# Altium PCB 606-100835.pcbdoc (part 3 of 3)
Units mm, origin at the board's own origin, x right, y up, seen from the top; angles counter-clockwise.
Board outline 27 x 28.35 mm, 6 copper layers (Layer 1, Layer 2, Layer 3, Layer 4, Layer 5, Layer 6), stack 1.518 mm thick; 145 components, 197 nets, 755 pads, 438 vias.
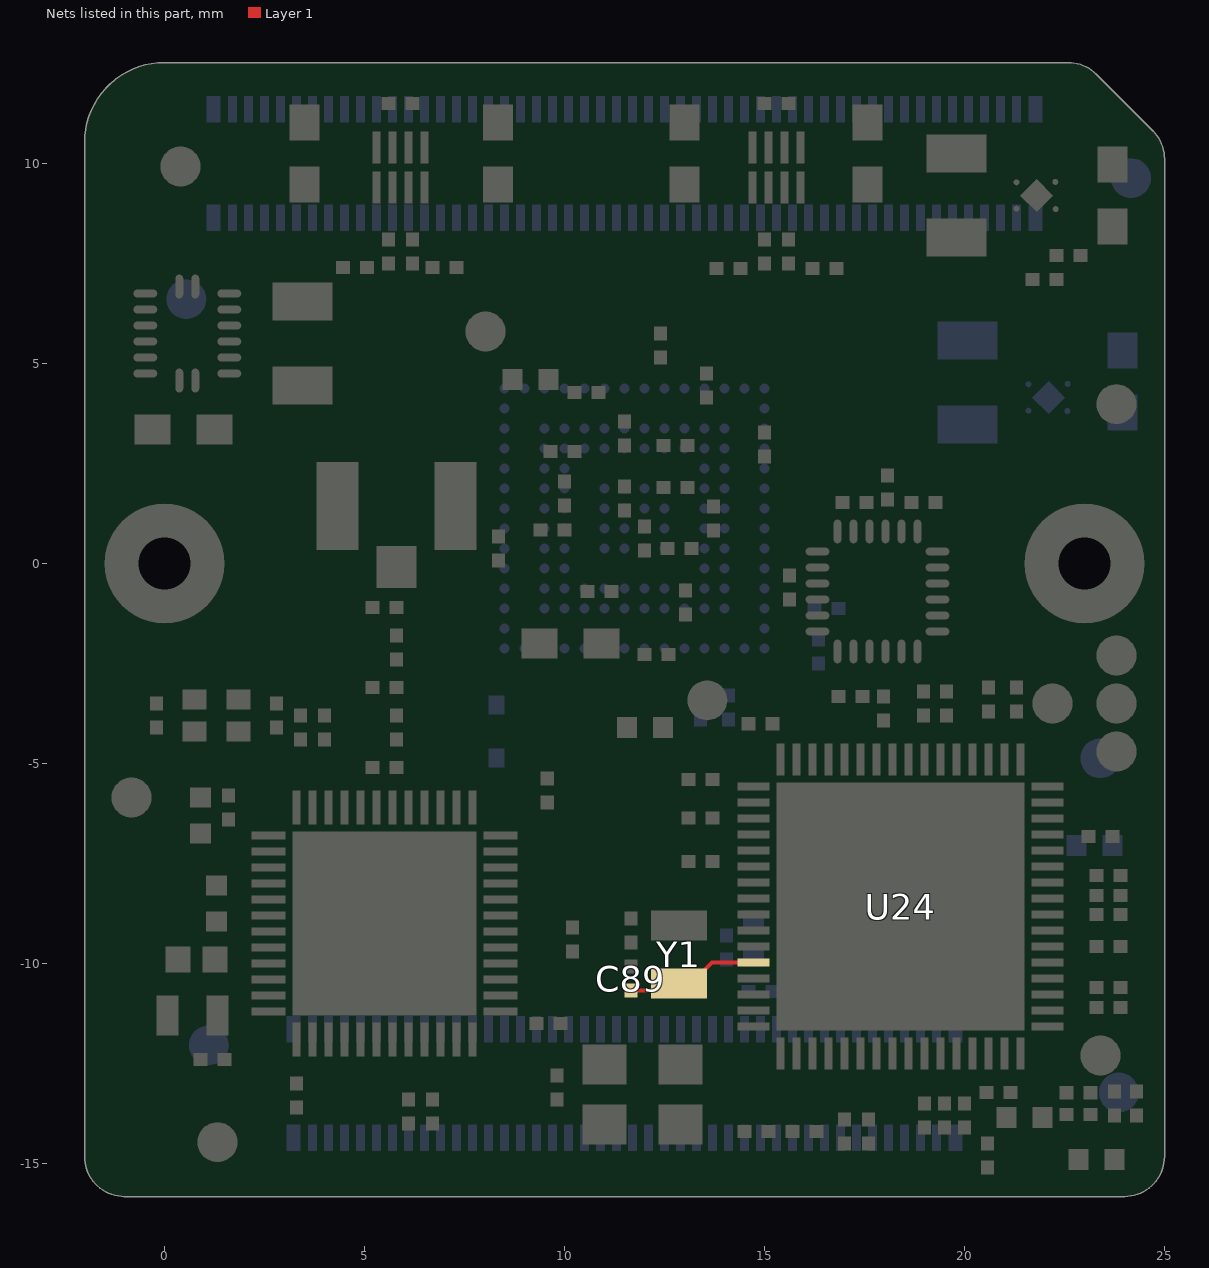
[diagram p7: the nets of this part, all layers, seen from the top]

## Via types
v1: diameter 0.4, hole 0.2, Layer 1 to Layer 6, tented both sides, 358 vias
v2: diameter 0.381, hole 0.279, Layer 4 to Layer 6, tented bottom, 80 vias

## Nets (pads, with @x,y where several pads share a name; then routed paths per layer and width w, separated by ;. In a path a pad name is that pad's centre, name@x,y a point inside that pad or via, vN(x,y) a via of type N, cw(c..) or ccw(c..) an arc to the next point about the centre after c; other vN are vias at no path point) (continued)
XOUT: C89.1 U24.12 Y1.2 | length 3.4
  Layer 1 w0.1: C89.1@11.659,-10.675 12.684,-10.675 Y1.2@12.859,-10.5 13.159,-10.5 13.684,-9.975 U24.12@14.725,-9.975
pads on no net: U1.A13 U1.H3 U1.J11 U1.K11 U1.M12 U1.M14 U4.1 U4.4 U4.15 U4.16 U23.1 U23.2 U23.3 U23.4 U23.5 U23.6 U23.7 U23.14 U23.15 U23.16 U23.17 U23.19 U23.21 U25.10 U25.18 U25.19 U25.27 U25.28 U25.29 U25.37 U25.38 U25.39 U25.40 U25.41 U25.42 U25.43 U25.44

## Polygon pours and split planes (outlines as drawn)
no net on FAB_DWG (solid): 17.95,277.4 17.95,279 11.925,279 11.925,277.4
no net on FAB_DWG (solid): 18.048,286.528 17.548,288.028 -13.452,288.028 -13.952,286.528 18.048,286.528
no net on FAB_DWG (solid): -13.673,268.247 -13.173,266.747 17.827,266.747 18.327,268.247 -13.673,268.247
no net on FAB_DWG (solid): -13.811,303.588 -13.311,302.088 17.889,302.088 18.389,303.588 -13.811,303.588
no net on FAB_DWG (solid): -14.694,324.252 -14.194,325.752 18.324,325.752 18.824,324.252
no net on FAB_DWG (solid): -10.978,261.558 ccw(c-11.478,261.558) -11.478,262.058 ccw(c-11.478,261.558) -11.978,261.558 ccw(c-11.478,261.558) -11.478,261.058 ccw(c-11.478,261.558) -10.978,261.558
no net on FAB_DWG (solid): -11.171,331.178 ccw(c-11.671,331.178) -11.671,331.678 ccw(c-11.671,331.178) -12.171,331.178 ccw(c-11.671,331.178) -11.671,330.678 ccw(c-11.671,331.178) -11.171,331.178
no net on FAB_DWG (solid): -4.978,261.558 ccw(c-5.478,261.558) -5.478,262.058 ccw(c-5.478,261.558) -5.978,261.558 ccw(c-5.478,261.558) -5.478,261.058 ccw(c-5.478,261.558) -4.978,261.558
no net on FAB_DWG (solid): -2.978,261.558 ccw(c-3.478,261.558) -3.478,262.058 ccw(c-3.478,261.558) -3.978,261.558 ccw(c-3.478,261.558) -3.478,261.058 ccw(c-3.478,261.558) -2.978,261.558
no net on FAB_DWG (solid): -8.978,261.558 ccw(c-9.478,261.558) -9.478,262.058 ccw(c-9.478,261.558) -9.978,261.558 ccw(c-9.478,261.558) -9.478,261.058 ccw(c-9.478,261.558) -8.978,261.558
no net on FAB_DWG (solid): -6.978,261.558 ccw(c-7.478,261.558) -7.478,262.058 ccw(c-7.478,261.558) -7.978,261.558 ccw(c-7.478,261.558) -7.478,261.058 ccw(c-7.478,261.558) -6.978,261.558
no net on FAB_DWG (solid): -3.171,331.178 ccw(c-3.671,331.178) -3.671,331.678 ccw(c-3.671,331.178) -4.171,331.178 ccw(c-3.671,331.178) -3.671,330.678 ccw(c-3.671,331.178) -3.171,331.178
no net on FAB_DWG (solid): -5.171,331.178 ccw(c-5.671,331.178) -5.671,331.678 ccw(c-5.671,331.178) -6.171,331.178 ccw(c-5.671,331.178) -5.671,330.678 ccw(c-5.671,331.178) -5.171,331.178
no net on FAB_DWG (solid): -9.171,331.178 ccw(c-9.671,331.178) -9.671,331.678 ccw(c-9.671,331.178) -10.171,331.178 ccw(c-9.671,331.178) -9.671,330.678 ccw(c-9.671,331.178) -9.171,331.178
no net on FAB_DWG (solid): -7.171,331.178 ccw(c-7.671,331.178) -7.671,331.678 ccw(c-7.671,331.178) -8.171,331.178 ccw(c-7.671,331.178) -7.671,330.678 ccw(c-7.671,331.178) -7.171,331.178
no net on FAB_DWG (solid): 5.022,261.558 ccw(c4.522,261.558) 4.522,262.058 ccw(c4.522,261.558) 4.022,261.558 ccw(c4.522,261.558) 4.522,261.058 ccw(c4.522,261.558) 5.022,261.558
no net on FAB_DWG (solid): 3.022,261.558 ccw(c2.522,261.558) 2.522,262.058 ccw(c2.522,261.558) 2.022,261.558 ccw(c2.522,261.558) 2.522,261.058 ccw(c2.522,261.558) 3.022,261.558
no net on FAB_DWG (solid): -0.978,261.558 ccw(c-1.478,261.558) -1.478,262.058 ccw(c-1.478,261.558) -1.978,261.558 ccw(c-1.478,261.558) -1.478,261.058 ccw(c-1.478,261.558) -0.978,261.558
no net on FAB_DWG (solid): 1.022,261.558 ccw(c0.522,261.558) 0.522,262.058 ccw(c0.522,261.558) 0.022,261.558 ccw(c0.522,261.558) 0.522,261.058 ccw(c0.522,261.558) 1.022,261.558
no net on FAB_DWG (solid): 4.829,331.178 ccw(c4.329,331.178) 4.329,331.678 ccw(c4.329,331.178) 3.829,331.178 ccw(c4.329,331.178) 4.329,330.678 ccw(c4.329,331.178) 4.829,331.178
no net on FAB_DWG (solid): 2.829,331.178 ccw(c2.329,331.178) 2.329,331.678 ccw(c2.329,331.178) 1.829,331.178 ccw(c2.329,331.178) 2.329,330.678 ccw(c2.329,331.178) 2.829,331.178
no net on FAB_DWG (solid): -1.171,331.178 ccw(c-1.671,331.178) -1.671,331.678 ccw(c-1.671,331.178) -2.171,331.178 ccw(c-1.671,331.178) -1.671,330.678 ccw(c-1.671,331.178) -1.171,331.178
no net on FAB_DWG (solid): 0.829,331.178 ccw(c0.329,331.178) 0.329,331.678 ccw(c0.329,331.178) -0.171,331.178 ccw(c0.329,331.178) 0.329,330.678 ccw(c0.329,331.178) 0.829,331.178
no net on FAB_DWG (solid): 11.022,261.558 ccw(c10.522,261.558) 10.522,262.058 ccw(c10.522,261.558) 10.022,261.558 ccw(c10.522,261.558) 10.522,261.058 ccw(c10.522,261.558) 11.022,261.558
no net on FAB_DWG (solid): 9.022,261.558 ccw(c8.522,261.558) 8.522,262.058 ccw(c8.522,261.558) 8.022,261.558 ccw(c8.522,261.558) 8.522,261.058 ccw(c8.522,261.558) 9.022,261.558
no net on FAB_DWG (solid): 13.022,261.558 ccw(c12.522,261.558) 12.522,262.058 ccw(c12.522,261.558) 12.022,261.558 ccw(c12.522,261.558) 12.522,261.058 ccw(c12.522,261.558) 13.022,261.558
no net on FAB_DWG (solid): 7.022,261.558 ccw(c6.522,261.558) 6.522,262.058 ccw(c6.522,261.558) 6.022,261.558 ccw(c6.522,261.558) 6.522,261.058 ccw(c6.522,261.558) 7.022,261.558
no net on FAB_DWG (solid): 10.829,331.178 ccw(c10.329,331.178) 10.329,331.678 ccw(c10.329,331.178) 9.829,331.178 ccw(c10.329,331.178) 10.329,330.678 ccw(c10.329,331.178) 10.829,331.178
no net on FAB_DWG (solid): 8.829,331.178 ccw(c8.329,331.178) 8.329,331.678 ccw(c8.329,331.178) 7.829,331.178 ccw(c8.329,331.178) 8.329,330.678 ccw(c8.329,331.178) 8.829,331.178
no net on FAB_DWG (solid): 12.829,331.178 ccw(c12.329,331.178) 12.329,331.678 ccw(c12.329,331.178) 11.829,331.178 ccw(c12.329,331.178) 12.329,330.678 ccw(c12.329,331.178) 12.829,331.178
no net on FAB_DWG (solid): 6.829,331.178 ccw(c6.329,331.178) 6.329,331.678 ccw(c6.329,331.178) 5.829,331.178 ccw(c6.329,331.178) 6.329,330.678 ccw(c6.329,331.178) 6.829,331.178
no net on FAB_DWG (solid): 17.022,261.558 ccw(c16.522,261.558) 16.522,262.058 ccw(c16.522,261.558) 16.022,261.558 ccw(c16.522,261.558) 16.522,261.058 ccw(c16.522,261.558) 17.022,261.558
no net on FAB_DWG (solid): 15.022,261.558 ccw(c14.522,261.558) 14.522,262.058 ccw(c14.522,261.558) 14.022,261.558 ccw(c14.522,261.558) 14.522,261.058 ccw(c14.522,261.558) 15.022,261.558
no net on FAB_DWG (solid): 16.829,331.178 ccw(c16.329,331.178) 16.329,331.678 ccw(c16.329,331.178) 15.829,331.178 ccw(c16.329,331.178) 16.329,330.678 ccw(c16.329,331.178) 16.829,331.178
no net on FAB_DWG (solid): 14.829,331.178 ccw(c14.329,331.178) 14.329,331.678 ccw(c14.329,331.178) 13.829,331.178 ccw(c14.329,331.178) 14.329,330.678 ccw(c14.329,331.178) 14.829,331.178
no net on FAB_DWG (solid): 18.361,310.587 17.861,312.087 -13.339,312.087 -13.839,310.587 18.361,310.587
no net on FAB_DWG (solid): 1029 vertices, not listed, extent 369.396,-60.519 510.442,-46.945
no net on FAB_DWG (solid): 89 vertices, not listed, extent 409.616,-50.711 416.035,-46.947
no net on FAB_DWG (solid): 74 vertices, not listed, extent 421.286,-53.682 428.678,-46.947
no net on FAB_DWG (solid): 83 vertices, not listed, extent 435.068,-52.447 439.973,-47.859
no net on FAB_DWG (solid): 82 vertices, not listed, extent 446.68,-51.092 453.025,-47.864
no net on FAB_DWG (solid, pour order 2): 7.95,277.4 7.95,279 -14,279 -14,277.4
no net on ASY_DWG (solid): 1029 vertices, not listed, extent 369.396,-60.519 510.442,-46.945
no net on ASY_DWG (solid): 89 vertices, not listed, extent 409.616,-50.711 416.035,-46.947
no net on ASY_DWG (solid): 74 vertices, not listed, extent 421.286,-53.682 428.678,-46.947
no net on ASY_DWG (solid): 83 vertices, not listed, extent 435.068,-52.447 439.973,-47.859
no net on ASY_DWG (solid): 82 vertices, not listed, extent 446.68,-51.092 453.025,-47.864
no net on ASY_DWG_R (solid): 1029 vertices, not listed, extent -260.544,-60.477 -119.498,-46.903
no net on ASY_DWG_R (solid): 89 vertices, not listed, extent -166.137,-50.669 -159.717,-46.905
no net on ASY_DWG_R (solid): 74 vertices, not listed, extent -178.78,-53.64 -171.387,-46.905
no net on ASY_DWG_R (solid): 83 vertices, not listed, extent -190.074,-52.405 -185.169,-47.817
no net on ASY_DWG_R (solid): 82 vertices, not listed, extent -203.127,-51.05 -196.782,-47.822
no net on TITLEBLOCK (solid): 331 vertices, not listed, extent -11.699,-33.273 47.006,-26.653
no net on TITLEBLOCK (solid): 10.238,-26.873 12.776,-29.191 12.776,-26.873 10.238,-26.873
no net on TITLEBLOCK (solid): 5.051,-26.873 6.174,-28.082 7.253,-26.873 5.051,-26.873
no net on TITLEBLOCK (solid): 15.536,-28.773 16.526,-26.973 17.426,-28.773 15.536,-28.773
no net on TITLEBLOCK (solid): 26 vertices, not listed, extent 20.376,-28.173 23.076,-26.873
GND on Layer 5 "GND" (solid, remove dead copper, pour order 2): -2.876,13.977 -2.876,-16.773 26.174,-16.773 26.174,11.527 23.724,13.977
GND on Layer 1 "GND_L01_P086" (solid, remove dead copper, pour order 86): 24.7,7.3 24.7,8.725 24.525,8.9 23.175,8.9 23,8.725 23,7.35 23.25,7.1 24.5,7.1
GND on Layer 1 "GND_L01_P080" (solid, remove dead copper, pour order 80): 18.6,10 18.4,10.2 17.3,10.2 17.1,10 17.1,9.1 17.1,8.4 16.675,7.975 16.675,7.1 18.265,7.1 18.6,7.435
VCC_3V3_SENSORS on Layer 1 "VCC_3V3_SENSORS_L01_P076" (solid, remove dead copper, pour order 76): 15.705,9.7 15.805,9.8 17,9.8 17,8.7 16.95,8.65 15.855,8.65 15.705,8.8
SENSOR_VCC4 on Layer 1 "SENSOR_VCC4_L01_P074" (solid, remove dead copper, pour order 74): 15.714,10.8 15.714,12.2 15.799,12.285 20.215,12.285 20.3,12.2 20.3,11.4 19.5,10.6 18,10.6 16.825,10.6 16.6,10.6 16.4,10.4 16.4,10.1 15.714,10.1
VCC_3V3_SENSORS on Layer 1 "VCC_3V3_SENSORS_L01_P072" (solid, remove dead copper, pour order 72): 13.557,9.657 13.7,9.8 15,9.8 15,8.8 14.85,8.65 13.75,8.65 13.557,8.843
GND on Layer 1 "GND_L01_P070" (solid, remove dead copper, pour order 70): 13.15,8.575 11.725,8.575 11.384,8.916 11.384,10.025 11.484,10.125 13.392,10.125 13.392,8.817
VCC_3V3_SENSORS on Layer 1 "VCC_3V3_SENSORS_L01_P066" (solid, remove dead copper, pour order 66): 6.305,9.7 6.405,9.8 7.6,9.8 7.7,9.7 7.7,8.8 7.6,8.7 6.405,8.7 6.305,8.8
GND on Layer 1 "GND_L01_P064" (solid, remove dead copper, pour order 64): 9.693,8.575 7.992,8.575 7.792,8.775 7.792,10 7.892,10.1 9.8,10.1 9.9,10 9.9,8.782
GND on Layer 1 "GND_L01_P060" (solid, remove dead copper, pour order 60): 2.606,10.321 3.206,10.321 3.731,10.321 4.131,9.921 4.131,9.146 3.631,8.646 2.681,8.646 2.506,8.821 2.506,10.221
GND on Layer 1 "GND_L01_P008" (solid, pour order 8): 7.75,-4.225 7.325,-4.6 7.325,-5.575 5.4,-5.575 5.4,-4.775 4.4,-4.775 4.4,-3.975 3.175,-3.975 3.175,2.55 7.7,2.55
VCC_3V6 on Layer 1 "u4_3v6_notherm" (solid, remove dead copper, pour order 14): -1.75,7.6 -1.75,3.05 -1.425,2.725 0.075,2.725 0.175,2.825 0.175,4.05 -0.025,4.25 -1,4.25 -1,7.6
GND on Layer 1 "u4_gnd_notherm" (solid, remove dead copper, pour order 16): 0.9,2.75 2.975,2.75 4.2,3.975 4.2,5.25 2.087,5.25 1.4,5.25 1.4,5.05 2.087,5.05 2.087,4.362 1.975,4.25 0.975,4.25 0.775,4.05 0.775,2.875
VCC_1V2 on Layer 1 "u4_1v2_notherm" (solid, remove dead copper, pour order 18): 19 vertices, not listed, extent 0.3,5.8 4.2,8.15
VCC_3V6 on Layer 1 "u13_3v6" (solid, remove dead copper, pour order 20): 22.1,9.8 22.725,9.8 22.725,9.2 24.425,9.2 24.525,9.3 24.525,10.6 24.025,11.1 22.425,11.1 22.1,10.775
VCC_3V3_SENSORS on Layer 1 "u13_3v6" (solid, remove dead copper, pour order 22): 21,9.4 21,9.8 21.775,9.8 21.775,10.951 21.579,11.146 18.975,11.146 18.7,10.871 18.7,9.5 18.8,9.4
GND on Layer 1 "u13_gnd" (solid, remove dead copper, pour order 24): 21.8,8.6 21.1,8.6 21,8.6 21,9.1 18.9,9.1 18.8,9 18.8,7 18.85,6.95 21.75,6.95 21.845,7.045 21.845,7.535 21.875,7.535 21.875,8.525
VCC_3V3_SENSORS on Layer 1 "VCC_3V3_SENSORS_L01_P042" (solid, remove dead copper, pour order 42): 4.157,9.657 4.3,9.8 5.6,9.8 5.6,8.8 5.5,8.7 4.3,8.7 4.157,8.843
SENSOR_VCC3 on Layer 1 "SENSOR_VCC3_L01_P052" (solid, remove dead copper, pour order 52): 14.6,12.3 14.795,12.105 14.795,10 14,10 13.7,10.2 13.7,10.7 11.3,10.7 11.2,10.8 11.2,12.2 11.3,12.3
SENSOR_VCC2 on Layer 1 "SENSOR_VCC2_L01_P056" (solid, remove dead copper, pour order 56): 6.3,12.086 6.499,12.285 10.19,12.285 10.385,12.09 10.385,10.785 10.2,10.6 8.7,10.6 7.525,10.6 7.3,10.6 7.1,10.4 7.1,10 6.3,10
SENSOR_VCC1 on Layer 1 "SENSOR_VCC1_L01_P058" (solid, remove dead copper, pour order 58): 1.65,10.775 1.65,12.1 1.835,12.285 2.185,12.285 5.415,12.285 5.5,12.2 5.5,10.1 4.9,10.1 4.4,10.6 1.825,10.6
GND on Layer 1 "GND_L01_P128" (solid, pour order 128): 24 vertices, not listed, extent 8.675,-3.15 15.4,5.975
GND on Layer 6 "GND1" (solid, remove dead copper, pour order 10): 19,4.3 19,6.7 19.1,6.8 24.3,6.8 24.4,6.7 24.425,4.8 21.3,4.8 21.3,4.3
VCC_3V3_CORE on Layer 6 "VCC3-6" (solid, remove dead copper, pour order 32): 19,4 21.3,4 21.3,3.6 22,3.6 22,2.5 21.9,2.4 19,2.4
VCC_3V6 on Layer 6 "VCC3-6" (solid, remove dead copper, pour order 12): 24.475,4.6 24.475,2.8 24.3,2.625 22.3,2.624 22.3,3.5 22.9,3.5 22.9,4.7 24.375,4.7
VCC_3V3_SENSORS on Layer 3 "Bottom Overlay-No Net" (solid, pour order 126): 21.925,8.75 21.925,13.025 -2.5,13.025 -2.5,8.75 21.375,8.75
VCC_3V6 on Layer 3 "3V6_Polygon" (solid, pour order 94): 20.95,6.2 22.05,6.2 22.05,13.025 23.2,13.025 25.5,10.725 25.5,-16.325 16.675,-16.325 16.675,-12.65 20.95,-12.65
GND on Layer 3 "thievingL2" (solid, pour order 122): -0.75,2.25 -2.525,2.25 -2.525,-16.3 22.1,-16.3 22.1,2.275 22.1,8.85 -0.75,8.85
VCC_PLL on Layer 3 "VCC_PLL_L03_P088" (solid, remove dead copper, pour order 88): 8.5,1.6 9.3,1.6 10,0.9 10,0 10.6,-0.6 13.2,-0.6 13.4,-0.4 13.4,0.8 13.8,1.2 14.4,1.2 15.125,1.2 15.125,-1.475 8.5,-1.475
VCC_1V2 on Layer 3 "VCC_1V2_L03_P090" (solid, remove dead copper, pour order 90): 24 vertices, not listed, extent -0.85,-0.5 15.9,8.8
VCC_3V6 on Layer 3 "3V6_BUCK_INPUT" (solid, pour order 130): -2.5,8.75 -0.65,8.75 -0.65,2.25 -2.5,2.25
GND on Layer 3 "GND_CORNER" (solid, pour order 92): 25.525,-13.925 22.75,-13.925 22.525,-13.925 22.525,-16.325 25.525,-16.325 25.5,-16.3 25.5,-13.925
GND on Layer 4 "thievingL5" (solid, pour order 124): -2.5,13.025 -2.5,-16.325 25.525,-16.325 25.525,10.7 23.2,13.025
VCC_3V6 on Layer 2 (split plane): 47 vertices, not listed, extent -1.498,2.404 24.499,12.023
GND on Layer 2 (split plane): 18 vertices, not listed, extent -1.498,-5.171 4.371,7.746
VCC_3V3_SENSORS on Layer 2 (split plane): 24 vertices, not listed, extent -1.499,9.129 21.821,12.024
VCC_3V3_CORE on Layer 2 (split plane): 61 vertices, not listed, extent -1.499,-15.324 24.499,7.746

## Keep-outs
Layer 6:
  circle w0.254: c23,0 r2.305
  circle w0.254: c0,0 r2.305

## Other copper
Layer 1:
  text ".Layer_Name" at 19.375,-51.6 h2.54
Layer 3:
  text ".Layer_Name" at 18,-51.35 h2.54
Layer 5:
  text ".Layer_Name" at 18,-51.4 h2.54
Layer 4:
  text ".Layer_Name" at 18.2,-51.7 h2.54
Layer 6:
  text "'.Board_Number'-R'.PCB_Revision'" at -0.9,-14.725 h0.7 r270
  text ".Layer_Name" at 17.75,-51.6 h2.54
Layer 2 (plane layer: these items are gaps in the copper):
  pour cut-out: 3,2.75 7.775,2.75 7.775,-4.375 7.45,-4.65 7.45,-5.375 7.225,-5.625 6.325,-5.625 6.075,-5.9 6.075,-6.725 4.95,-6.725 4.95,-5.65 4.275,-4.975 4.275,-4.125 3,-4.125
  lines w0.254: -2.025,2.275 -1.15,2.275 ; -2,-3.3 -2,-5.3 3.7,-5.3 4.5,-4.5 4.5,7.85 ; -1.8,8.7 -1.5,9 21.95,9 21.95,12.25 22.25,12.55 22.35,12.55 ; -1.225,2.275 -1.125,2.275 -0.8,2.6 -0.8,7.3 -0.225,7.875 16.725,7.875 18.1,6.5 21.4,6.5 22.1,6.5 22.1,2.3 24.8,2.3 ; 9.45,-16.1 10.4,-16.1
  text ".Layer_Name" at 18.1,-51.55 h2.54

## Silkscreen, mask and mechanical layers (free items; w line width, h text height)
Top Overlay:
  lines w0.15: -1.075,-12.175 -1.075,-9.9 -0.4,-9.9 ; -1.075,-11.3 -0.6,-11.3 ; 11.6,-11.4 12.9,-11.4 12.9,-11.1 ; 17.5,2.4 17.5,3.2 17.5,6.5 18.4,6.5 22.79,6.5 22.79,1.8 19.7,1.8 ; 20.8,1.8 20.8,-2.4 21.6,-2.4 ; 21.6,-2.7 21.6,-1.8 23.2,-1.8 ; 23.05,-5.7 24.225,-5.7 24.35,-5.7 24.425,-5.7 24.425,-5.2
  lines w0.254: 5.268,-4.382 cw(c5.25,-4.4) 5.275,-4.4 ; 5.268,-2.382 cw(c5.25,-2.4) 5.275,-2.4
  lines w1.2: 11.375,9.9 11.375,11.1
  text "REV" at 11.9,6.35 h1.02 r90
  text "100835" at 10.425,6.325 h1.02 r90
  text ".Layer_Name" at 14,-51.6 h2.54
Bottom Overlay:
  text ".Layer_Name" at 9.925,-51.6 h2.54
Top Paste:
  text ".Layer_Name" at 15.05,-51.6 h2.54
Bottom Paste:
  text ".Layer_Name" at 13.025,-51.6 h2.54
Top Solder:
  text ".Layer_Name" at 15.175,-51.6 h2.54
Bottom Solder:
  text ".Layer_Name" at 11.85,-51.6 h2.54
OUTLINE:
  lines w0.15: -2,10.5 -2,-14.825 ccw(c-1,-14.825) -1,-15.825 ; -2,10.525 cw(c0,10.525) 0,12.525 ; -1.025,-15.825 24,-15.825 ccw(c24,-14.825) 25,-14.825 25,10.1 ; 0.025,12.525 22.611,12.525 ; 22.586,12.525 cw(c22.586,11.525) 23.293,12.232 24.707,10.818 cw(c24,10.111) 25,10.111
FAB_DWG:
  drawing of 395 lines, arcs and shapes, not listed
  text "1" at 453.278,397.469 h7.62
  text "6" at -98.054,397.291 h7.62
  text "5" at 12.538,397.215 h7.62
  text "7" at -207.985,397.164 h7.62
  text "4" at 122.139,397.063 h7.62
  text "3" at 232.908,397.063 h7.62
  text "2" at 342.941,397.063 h7.62
  text "REVISIONS" at 407.298,388.481 h2.54
  text "REV" at 325.006,381.481 h2.03
  text "DESCRIPTION" at 379.51,381.481 h2.03
  text "DATE" at 471.194,381.481 h2.03
  text "APRVD" at 496.382,381.481 h2.03
  text "NOTES: UNLESS OTHERWISE SPECIFIED" at -247.908,376.845 h2.03
  text "INITIAL RELEASE" at 336.442,373.481 h2.54
  text "06/03/16" at 465.282,373.481 h2.54
  text "01" at 325,373 h2.54
  text "1   DIMENSIONS AND VALUES ARE METRIC." at -247.908,368.845 h2.03
  text "INITIAL BUILD" at 336.442,366.506 h2.54
  text "06/06/16" at 465.282,366.506 h2.54
  text "02" at 325,366 h2.54
  text "2   FABRICATION OF PRINTED CIRCUIT BOARD SHALL BE IN ACCORDANCE WITH" at -247.908,362.845 h2.03
  text "03" at 325,360 h2.54
  text "ANTENNA TUNING, POWER TEST POINTS." at 336,360 h2.54
  text "07/13/16" at 465,360 h2.54
  text "IPC-6011 AND IPC-6012, CLASS 2, AND THE DESIGN INTENT OF IPC-2221 AND" at -247.908,358.845 h2.03
  text "IPC-2222,CLASS 2, AND SHALL MEET THE ACCEPTABILITY REQUIREMENTS OF" at -247.908,354.845 h2.03
  text "IPC-A-600. PRODUCE PCB USING GERBER OR ODB++ FILES PROVIDED." at -247.908,350.845 h2.03
  text "3   FABRICATION VENDOR MUST BE UL APPROVED AND BOARD SHALL BE MARKED WITH" at -247.908,344.845 h2.03
  text "PRIMARY SIDE" at -7.675,341.35 h2.29
  text "A UL REGISTERED LOGO. MATERIAL MUST MEET UL 94V-0 FLAMMABILITY RATING." at -247.908,340.845 h2.03
  text "SILKSCREEN" at 24.564,336.241 h2.29
  text "4   MATERIAL REQUIREMENTS: MANUFACTURER SHALL SELECT MATERIALS TO ACHIEVE A" at -247.908,334.845 h2.03
  text "BALANCED CONSTRUCTION WITH THE OPTION OF MODIFYING DIELECTRIC THICKNESS" at -247.908,330.845 h2.03
  text "SOLDERMASK" at 24.564,330.741 h2.29
  text "D" at 515.127,327.797 h7.62
  text "D" at -269.555,327.645 h7.62
  text "TO MEET THE REQUIREMENTS SPECIFIED HEREIN." at -247.908,326.845 h2.03
  text "LAYER 1 (SIGNAL)" at 24.564,323.741 h2.29
  text "1/4 OZ CU" at -39.525,323.675 h2.29
  text "5  BASE MATERIALS: GLASS EPOXY FR4 OR EQUIVALENT PER IPC-4101 MEETING RoHS" at -247.908,320.845 h2.03
  text "DIELECTRIC" at -38.45,317.9 h2.29
  text "REQUIREMENTS FOR PCB FABRICATION AND ASSEMBLY, NOT LESS THAN TG150," at -247.908,316.845 h2.03
  text "A  SEE LAYER DETAIL FOR LAYER STACK UP, ESTIMATED DIELECTRIC THICKNESS," at -247.908,312.845 h2.03
  text "1/2 OZ CU" at -39.3,310.325 h2.29
  text "LAYER 2 (POWER)" at 23.875,310.3 h2.29
  text "AND COPPER WEIGHT." at -247.908,308.845 h2.03
  text "DIELECTRIC" at -38.7,305.75 h2.29
  text "B  MANUFACTURER SHALL SUBMIT A PROPOSED STACK UP FOR SYNAPSE APPROVAL" at -247.908,304.845 h2.03
  text "LAYER 3 (SIGNAL)" at 23.875,301.325 h2.29
  text "1/2 OZ CU" at -39.025,301.05 h2.29
  text "IF MODIFICATION IS REQUIRED." at -247.908,300.845 h2.03
  text "1.57 +/-0.15" at -80.151,300.679 h2.29
  text "C  NO MATERIAL SUBSTITUTIONS WILL BE ALLOWED WITHOUT SYNAPSE APPROVAL." at -247.908,296.845 h2.03
  text "FINISHED" at -76.487,295.679 h2.29
  text "DIELECTRIC" at -38.175,294.65 h2.29
  text "6   PROCESSING ALLOWANCE:" at -247.908,290.845 h2.03
  text "THICKNESS" at -77.903,290.679 h2.29
  text "1/2 OZ CU" at -39.3,287.025 h2.29
  text "A  LAYER REGISTRATION FROM PRIMARY SIDE TO SECONDARY SIDE SHALL NOT" at -247.908,286.845 h2.03
  text "LAYER 4 (SIGNAL)" at 23.7,286.575 h2.29
  text "EXCEED 0.13mm TOTAL." at -247.908,282.845 h2.03
  text "DIELECTRIC" at -38.375,282.375 h2.29
  text "B  MAXIMUM BOW AND TWIST SHALL BE .75% PER IPC-TM-650." at -247.908,278.845 h2.03
  text "1/2 OZ CU" at -39.05,277.75 h2.29
  text "BLIND VIAS Layers 4-6" at 57.7,277.225 h2.29
  text "LAYER 5 (GROUND)" at 23.875,277.125 h2.29
  text "7   VIAS" at -247.908,272.845 h2.03
  text "DIELECTRIC" at -38,271.1 h2.29
  text "A  VIAS WITH A FINISHED HOLE SIZE OF 0.25mm OR SMALLER DO NOT REQUIRE" at -247.908,268.845 h2.03
  text "LAYER 6 (SIGNAL)" at 24.263,266.9 h2.29
  text "1/4 OZ CU" at -38.875,265.225 h2.29
  text "A MINIMUM HOLE SIZE AND MAY BE PLATED SHUT OR FILLED WITH SOLDER" at -247.908,264.845 h2.03
  text "SOLDERMASK" at 24.364,261.316 h2.29
  text "MASK. MINIMUM SOLDER PLATING MUST BE MAINTAINED." at -247.908,260.845 h2.03
  text "B  ALL LASER VIA IN PADS TO BE COPLANAR IF PRESENT IN DESIGN." at -247.908,256.845 h2.03
  text "SILKSCREEN" at 24.364,255.316 h2.29
  text "C  ALL VIAS AND PLATED TROUGH-HOLES CAN BE STACKED AS REQUIRED FOR BEST BUILD." at -247.85,252.825 h2.03
  text "D  ALL DRILLED VIAS-IN-PAD TO BE FILLED WITH NON-CONDUCTIVE EPOXY." at -247.85,248.825 h2.03
  text "SECONDARY SIDE" at -10.4,248.45 h2.29
  text "8   CONDUCTORS:  COPPER FOIL SHALL BE IN ACCORDANCE WITH IPC-4562/0." at -247.908,240.62 h2.03
  text "A  FINISH. COPPER PLATE THICKNESS ON SURFACE COPPER AND PLATED" at -247.908,236.62 h2.03
  text "THROUGH HOLES TO BE 0.025mm MINIMUM." at -247.908,232.62 h2.03
  text "LAYER DETAIL" at -20.647,229.681 h5.08
  text "B  MINIMUM FINISH CONDUCTOR WIDTH IS 0.083mm" at -247.908,228.62 h2.03
  text "C  MINIMUM FINISHED CONDUCTOR SPACING (AIR GAP) INCLUDING PADS, VIAS," at -247.908,224.62 h2.03
  text "SCALE:NONE" at -6.923,222.676 h2.29
  text "SHAPES, ETC. IS 0.083mm." at -247.908,220.62 h2.03
  text "9   FINAL FINISH SHALL BE ELECTROLESS NICKEL / IMMERSION GOLD (ENIG)." at -247.908,214.62 h2.03
  text "CAP CONSTRUCTION SHOWN (PREFERRED)" at -26.907,214.481 h2.29
  text "FINISH THICKNESS SHALL BE 3 TO 6 um [118 TO 236 MICROINCHES] OF NICKEL" at -247.908,210.62 h2.03
  text "CORE CONSTRUCTION ACCEPTABLE" at -21.411,209.676 h2.29
  text "AND 0.04 TO 0.125um [1.5 TO 5 MICROINCHES] OF GOLD." at -247.908,206.62 h2.03
  text "FINISH SHALL BE RoHS COMPLIANT AND MEET REQUIREMENTS OF IPC-4552." at -247.908,202.62 h2.03
  text "C" at 515.127,202.346 h7.62
  text "C" at -269.682,202.143 h7.62
  text "10  FILLETING IS NOT PERMITTED WITHOUT PRIOR SYNAPSE APPROVAL." at -247.908,196.62 h2.03
  text "11  SOLDER MASK AND COATING:" at -247.908,190.62 h2.03
  text "A  APPLY SOLDERMASK TO PRIMARY AND SECONDARY" at -247.908,185.62 h2.03
  text "SIDES OF PRINTED WIRING BOARD USING SUPPLIED GERBER FILES IN ACCORDANCE" at -247.908,181.62 h2.03
  text "WITH IPC-SM-840, THICKNESS BETWEEN 0.02 - 0.04mm, COLOR GREEN LIQUID" at -247.908,177.62 h2.03
  text "REF" at -19.191,175.19 h2.29
  text "TRACE" at 31.977,175.19 h2.29
  text "DIFF" at 45.893,175.19 h2.29
  text "SIG" at 58.809,175.19 h2.29
  text "PHOTO-IMAGEABLE, CLASS 2." at -247.908,173.62 h2.03
  text "LAYER" at -60.023,173.19 h2.29
  text "IMPEDANCE" at -41.687,173.19 h2.29
  text "TYPE" at 5.893,173.19 h2.29
  text "LYR" at -19.191,171.19 h2.29
  text "WIDTH" at 31.977,171.19 h2.29
  text "GAP" at 45.809,171.19 h2.29
  text "TYPE" at 58.893,171.19 h2.29
  text "B  DO NOT ADJUST SOLDERMASK-DEFINED CLEARANCE." at -247.908,168.62 h2.03
  text "12  OVERALL BOARD THICKNESS SHALL BE MEASURED OVER FINAL FINISH INCLUDING" at -247.908,162.62 h2.03
  text "50 OHM" at -41.443,160.74 h2.29
  text "3" at -17.359,160.74 h2.29
  text ".279" at 32.893,160.74 h2.29
  text "COPLANAR WAVEGUIDE" at -8.35,160.325 h2.29
  text "LAYER 1" at -61.855,160.19 h2.29
  text "SOLDER MASK." at -247.908,158.62 h2.03
  text "13  SILKSCREEN:  APPLY SILKSCREEN (LEGEND) TO PRIMARY AND SECONDARY SIDES" at -247.908,152.62 h2.03
  text "OF PRINTED CIRCUIT BOARD. USE PERMANENT INK, NON-NUTRIENT, NON-" at -247.908,148.62 h2.03
  text "LAYER 6" at -61.855,148.19 h2.29
  text "CONDUCTIVE POLYMER, COLOR WHITE, PER IPC-4781, TYPE 2. RELIEVE LEGEND" at -247.908,144.62 h2.03
  text "FROM ALL EXPOSED LANDS AND HOLES AS REQUIRED." at -247.908,140.62 h2.03
  text "14  ANY ALTERATIONS TO THE PROVIDED GERBER ARTWORK FILES MUST BE SUBMITTED" at -247.908,134.62 h2.03
  text "TO SYNAPSE FOR APPROVAL." at -247.908,130.62 h2.03
  text "15  IMPEDANCE REQUIREMENTS: LAYERS AND SIGNALS WITH CONTROLLED IMPEDANCES" at -247.908,124.62 h2.03
  text "ARE DETAILED IN THE CONTROLLED IMPEDANCE CHART. MANUFACTURER HAS THE" at -247.908,120.62 h2.03
  text "OPTION OF ADJUSTING THE DIELECTRIC THICKNESS AND TRACE WIDTHS AS" at -240.158,116.37 h2.03
  text "REQUIRED TO MEET THE SPECIFICATIONS CONTAINED IN THIS DRAWING." at -240.158,112.37 h2.03
  text "IMPEDANCE CONTROL CHART" at -46.179,109.19 h5.08
  text "A  IMPEDANCE TOLERANCES ARE +/-10%." at -247.658,107.37 h2.03
  text "B  ANY ADJUSTMENTS TO DIELECTRIC THICKNESS OR TRACE WIDTHS MUST BE" at -247.658,102.62 h2.03
  text "14" at -1.067,100.19 h2.03
  text "APPROVED BY SYNAPSE." at -247.908,98.87 h2.03
  text "C  IMPEDANCE TEST RESULTS AND TEST COUPONS FROM EACH LOT SHALL BE" at -248,95 h2.03
  text "PROVIDED TO SYNAPSE." at -248,91 h2.03
  text "16  MARK MANUFACTURER NAME, INITIALS, OR LOGO, LOT NUMBER, DATE CODE," at -247.908,85.12 h2.03
  text "UL RECOGNITION MARK AND FLAME RATING IN ETCH OR SILKSCREEN." at -247.908,81.12 h2.03
  text "B" at -269.453,76.743 h7.62
  text "B" at 515.254,76.743 h7.62
  text "17  PANELIZATION: COORDINATE WITH SYNAPSE OR THE SYNAPSE SPECIFIED" at -247.908,75.37 h2.03
  text "ASSEMBLY VENDOR FOR PANEL SIZE AND CONFIGURATION. IF BOARDS ARE" at -247.908,71.37 h2.03
  text "NOT TO BE COMPLETELY ROUTED OUT, TRIM PANELIZATION TABS TO LESS" at -247.908,67.37 h2.03
  text "THAN 0.1mm UPON DE-PANELIZATION. AVOID PANELIZATION TABS IN AREAS" at -247.908,63.37 h2.03
  text "INDICATED ON THIS DRAWING." at -247.908,59.37 h2.03
  text "18  BOARD MUST BE ELECTRICALLY TESTED USING SUPPLIED IPC-356 NETLIST." at -247.408,54.37 h2.03
  text "x 5" at 39.108,-18.841 h1.5
  text "A" at 515,-49.012 h7.62
  text "A" at -269.707,-49.139 h7.62
  text "APPROVALS" at 307.134,-52.519 h2.03
  text "DATE" at 350.194,-52.519 h2.03
  text "UNLESS OTHERWISE" at 251.186,-54.519 h2.54
  text "DESIGNER" at 290.442,-58.519 h2.03
  text "SPECIFIED" at 258.298,-59.519 h2.54
  text "DIMENSIONS ARE" at 253.218,-64.519 h2.54
  text "07/13/16" at 344.282,-64.519 h2.54
  text "PRICE" at 294.3,-64.6 h2.54
  text "1511 Sixth Ave. Suite 300, Seattle, WA 98101 206.381.0898" at 381.53,-65.519 h2.54
  text "IN MILLIMETERS" at 253.218,-69.519 h2.54
  text "ENGINEER" at 290.442,-71.519 h2.03
  text "PRINTED CIRCUIT BOARD" at 407.938,-74.019 h3.81
  text "PROPRIETARY" at 202.678,-74.519 h3.81
  text "BRUEY" at 294.442,-77.519 h2.54
  text "TOLERANCES:" at 257.266,-79.519 h2.54
  text "AND" at 214.87,-80.519 h3.81
  text ".Board_Name" at 416.25,-82.1 h5.08
  text "MECH ENG" at 290.442,-84.519 h2.03
  text ".XX" at 255.946,-86.519 h2.29
  text "0.25" at 269.442,-86.519 h2.29
  text "CONFIDENTIAL" at 201.154,-87.269 h3.81
  text "SIZE" at 373.594,-88.519 h1.78
  text "DWG NO" at 384.442,-88.519 h1.78
  text "REV" at 492.306,-88.519 h1.78
  text "CHENG" at 294.442,-90.519 h2.54
  text "THE INFORMATION CONTAINED IN" at 203.168,-91.519 h1.52
  text ".XXX" at 254.114,-93.519 h2.29
  text "0.127" at 269.442,-93.519 h2.29
  text "THIS DRAWING IS PROPRIETARY AND" at 201.344,-94.269 h1.52
  text "RESTRICTED. ANY REPRODUCTION" at 203.168,-97.019 h1.52
  text ".Board_Number" at 433.6,-97.85 h7.62
  text "601-" at 404.562,-97.869 h7.62
  text "D" at 373.394,-98.519 h7.62
  text ".PCB_Revision" at 488.346,-98.519 h7.62
  text "IN PART OR WHOLE WITHOUT THE" at 203.168,-99.769 h1.52
  text "ANGLES" at 256.45,-100.519 h2.29
  text "5" at 275.442,-100.519 h2.29
  text "EXPRESS WRITTEN PERMISSION" at 204.134,-102.519 h1.52
  text "OF THE OWNER IS PROHIBITED" at 204.134,-105.269 h1.52
  text "SCALE:NONE" at 374.322,-105.519 h1.78
  text "SHEET 1 OF 1" at 485.898,-105.519 h1.78
  text "1" at 453.482,-117.567 h7.62
  text "6" at -97.978,-117.719 h7.62
  text "5" at 12.461,-117.719 h7.62
  text "4" at 121.91,-117.998 h7.62
  text "3" at 232.73,-118.024 h7.62
  text "2" at 343.169,-118.024 h7.62
  text "7" at -208.087,-118.583 h7.62
ASY_DWG:
  circle w0.38: c279.185,-97.971 r0.829
  lines w0.025: -250.058,358.23 -250.058,363.232 -245.059,363.232 -245.059,358.23 -250.058,358.23
  lines w0.3: 289.442,-107.519 289.442,-47.519 ; 289.442,-93.519 369.442,-93.519 ; 289.442,-80.519 369.442,-80.519 ; 289.442,-67.519 369.442,-67.519 510.442,-67.519 ; 289.442,-54.519 369.442,-54.519 ; 320.212,323.691 510.212,323.691 ; 320.212,330.441 510.212,330.441 ; 320.212,337.316 510.212,337.316 ; 320.242,344.106 510.242,344.106 ; 320.242,350.856 510.242,350.856 ; 320.242,357.731 510.242,357.731 ; 320.442,364.481 510.442,364.481 ; 320.767,371.573 320.442,371.481 510.442,371.481 ; 320.767,386.573 320.442,386.481 510.442,386.481 ; 334.412,323.441 334.412,352.441 ; 334.442,343.856 334.442,372.856 ; 334.442,350.606 334.442,379.606 ; 334.442,357.481 334.442,386.481 ; 339.442,-107.519 339.442,-47.519 ; 369.442,-107.519 369.442,-47.519 ; 369.442,-101.519 510.442,-101.519 ; 369.442,-85.519 509.442,-85.519 ; 382.442,-101.519 382.442,-85.519 ; 459.412,323.441 459.412,352.441 ; 459.442,343.856 459.442,372.856 ; 459.442,350.606 459.442,379.606 ; 459.442,357.481 459.442,386.481 ; 478.442,-101.519 478.442,-85.519 ; 490.412,323.441 490.412,352.441 ; 490.442,343.856 490.442,372.856 ; 490.442,350.606 490.442,379.606 ; 490.442,357.481 490.442,386.481
  lines w0.38: 264.442,-93.519 266.442,-93.519 ; 264.442,-91.519 266.442,-91.519 ; 264.442,-86.519 266.442,-86.519 ; 264.442,-84.519 266.442,-84.519 ; 265.442,-92.519 265.442,-90.519 ; 265.442,-85.519 265.442,-83.519 ; 270.442,-100.519 272.442,-100.519 ; 270.442,-98.519 272.442,-98.519 ; 271.442,-99.519 271.442,-97.519
  lines w0.508: 290.464,393.685 290.464,406.639 ; 290.464,393.685 290.464,406.639 ; 290.464,393.685 290.464,406.639 ; -280.147,17.13 -260.843,17.13 -280.147,17.13 ; -280.147,17.587 -260.843,17.587 -280.147,17.587 ; -280.147,142.529 -260.843,142.529 -280.147,142.529 ; -280.147,142.987 -260.843,142.987 -280.147,142.987 ; -280.147,267.929 -260.843,267.929 -280.147,267.929 ; -280.147,268.386 -260.843,268.386 -280.147,268.386 ; -150.911,-120.97 -150.911,-108.016 -150.911,-120.97 ; -150.911,393.685 -150.911,406.639 -150.911,393.685 ; -150.454,-120.97 -150.454,-108.016 -150.454,-120.97 ; -150.454,393.685 -150.454,406.639 -150.454,393.685 ; -40.701,-120.97 -40.701,-108.016 -40.701,-120.97 ; -40.701,393.685 -40.701,406.639 -40.701,393.685 ; -40.244,-120.97 -40.244,-108.016 -40.244,-120.97 ; -40.244,393.685 -40.244,406.639 -40.244,393.685 ; 69.535,-120.97 69.535,-108.016 69.535,-120.97 ; 69.535,393.685 69.535,406.639 69.535,393.685 ; 69.992,-120.97 69.992,-108.016 69.992,-120.97 ; 69.992,393.685 69.992,406.639 69.992,393.685 ; 179.797,393.685 179.797,406.639 179.797,393.685 ; 180.254,393.685 180.254,406.639 180.254,393.685 ; 290.007,393.685 290.007,406.639 290.007,393.685 ; 400.218,393.939 400.218,406.639 400.218,393.939 ; 400.243,-120.97 400.243,-108.016 400.243,-120.97 ; 400.675,393.685 400.675,406.639 400.675,393.685 ; 400.7,-120.97 400.7,-108.016 400.7,-120.97 ; 510.682,17.13 529.986,17.13 510.682,17.13 ; 510.682,17.587 529.986,17.587 510.682,17.587 ; 510.682,142.555 529.986,142.555 510.682,142.555 ; 510.682,143.012 529.986,143.012 510.682,143.012 ; 510.682,267.98 529.986,267.98 510.682,267.98 ; 510.682,268.437 529.986,268.437 510.682,268.437
  lines w1: -260.558,-107.519 510.442,-107.519 510.442,393.481 -260.558,393.481 -260.558,-107.519
  lines w1.1: 180.442,-120.519 180.442,-107.519 ; 194.442,-107.519 194.442,-67.519 245.442,-67.519 ; 245.442,-107.519 245.442,-67.519 ; 289.442,-120.519 289.442,-107.519 ; 320.412,323.441 320.412,359.441 ; 320.442,343.856 320.442,379.856 ; 320.442,350.606 320.442,386.606 ; 320.442,357.481 320.442,393.481 ; 320.442,378.481 510.442,378.481 ; 369.442,-47.519 245.442,-47.519 245.442,-67.519
  text "1" at 453.278,397.469 h7.62
  text "6" at -98.054,397.291 h7.62
  text "5" at 12.538,397.215 h7.62
  text "7" at -207.985,397.164 h7.62
  text "4" at 122.139,397.063 h7.62
  text "3" at 232.908,397.063 h7.62
  text "2" at 342.941,397.063 h7.62
  text "REVISIONS" at 407.298,388.481 h2.54
  text "NOTES: UNLESS OTHERWISE SPECIFIED" at -248.408,381.481 h2.03
  text "REV" at 325.006,381.481 h2.03
  text "DESCRIPTION" at 379.51,381.481 h2.03
  text "DATE" at 471.194,381.481 h2.03
  text "APRVD" at 496.382,381.481 h2.03
  text "1   RoHS COMPLIANT ASSEMBLY REQUIRED. ASSEMBLE PER IPC-A-610, CLASS 2," at -248.308,374.981 h2.03
  text "INITIAL RELEASE" at 336.442,373.481 h2.54
  text "06/03/16" at 465.282,373.481 h2.54
  text "01" at 325,373 h2.54
  text "2   AQUEOUS BASED CLEANING AFTER SOLDER FOR ALL COMPONENTS IS PREFERRED, FOR DESIGNS WITH" at -248.214,369.776 h2.03
  text "INITIAL BUILD" at 336.442,366.506 h2.54
  text "06/06/16" at 465.282,366.506 h2.54
  text "02" at 325,366 h2.54
  text "CSP CHIP(S) PRESENT IN DESIGN USE ONLY NO-CLEAN RoHS SOLDER PROCESS." at -248.358,365.631 h2.03
  text "ANTENNA TUNING, POWER TEST POINTS." at 336,360 h2.54
  text "07/13/16" at 465,360 h2.54
  text "3   ITEM IDENTIFICATION: MARK REVISION NUMBER OF THIS DRAWING IN THE SPACE PROVIDED." at -248.558,359.731 h2.03
  text "D" at 515.127,327.797 h7.62
  text "D" at -269.555,327.645 h7.62
  text "C" at 515.127,202.346 h7.62
  text "C" at -269.682,202.143 h7.62
  text "B" at -269.453,76.743 h7.62
  text "B" at 515.254,76.743 h7.62
  text "ASSEMBLY TOP" at -26.8,-41.3 h7.62
  text "A" at 515,-49.012 h7.62
  text "A" at -269.707,-49.139 h7.62
  text "APPROVALS" at 307.134,-52.519 h2.03
  text "DATE" at 350.194,-52.519 h2.03
  text "UNLESS OTHERWISE" at 251.186,-54.519 h2.54
  text "DESIGNER" at 290.442,-58.519 h2.03
  text "SPECIFIED" at 258.298,-59.519 h2.54
  text "DIMENSIONS ARE" at 253.218,-64.519 h2.54
  text "PRICE" at 294.442,-64.519 h2.54
  text "07/13/16" at 344.282,-64.519 h2.54
  text "1511 Sixth Ave. Suite 300, Seattle, WA 98101 206.381.0898" at 381.53,-65.519 h2.54
  text "IN MILLIMETERS" at 253.218,-69.519 h2.54
  text "ENGINEER" at 290.442,-71.519 h2.03
  text "PRINTED CIRCUIT BOARD ASSEMBLY" at 394.222,-74.019 h3.81
  text "PROPRIETARY" at 202.678,-74.519 h3.81
  text "BRUEY" at 294.442,-77.519 h2.54
  text "TOLERANCES:" at 257.266,-79.519 h2.54
  text "AND" at 214.87,-80.519 h3.81
  text ".Board_Name" at 409.5,-82.5 h5.08
  text "MECH ENG" at 290.442,-84.519 h2.03
  text ".XX" at 255.946,-86.519 h2.29
  text "0.25" at 269.442,-86.519 h2.29
  text "CONFIDENTIAL" at 201.154,-87.269 h3.81
  text "SIZE" at 373.594,-88.519 h1.78
  text "DWG NO" at 384.442,-88.519 h1.78
  text "REV" at 492.306,-88.519 h1.78
  text "CHENG" at 294.442,-90.519 h2.54
  text "THE INFORMATION CONTAINED IN" at 203.168,-91.519 h1.52
  text ".XXX" at 254.114,-93.519 h2.29
  text "0.127" at 269.442,-93.519 h2.29
  text "THIS DRAWING IS PROPRIETARY AND" at 201.344,-94.269 h1.52
  text "RESTRICTED. ANY REPRODUCTION" at 203.168,-97.019 h1.52
  text ".Board_Number" at 433.6,-97.85 h7.62
  text "600-" at 404.562,-97.869 h7.62
  text "D" at 373.394,-98.519 h7.62
  text ".PCB_Revision" at 488.346,-98.519 h7.62
  text "IN PART OR WHOLE WITHOUT THE" at 203.168,-99.769 h1.52
  text "ANGLES" at 256.45,-100.519 h2.29
  text "5" at 275.442,-100.519 h2.29
  text "EXPRESS WRITTEN PERMISSION" at 204.134,-102.519 h1.52
  text "OF THE OWNER IS PROHIBITED" at 204.134,-105.269 h1.52
  text "SCALE:NONE" at 374.322,-105.519 h1.78
  text "SHEET 1 OF 1" at 485.898,-105.519 h1.78
  text "1" at 453.482,-117.567 h7.62
  text "6" at -97.978,-117.719 h7.62
  text "5" at 12.461,-117.719 h7.62
  text "4" at 121.91,-117.998 h7.62
  text "3" at 232.73,-118.024 h7.62
  text "2" at 343.169,-118.024 h7.62
  text "7" at -208.087,-118.583 h7.62
ASY_DWG_R:
  lines w0.3: -260.544,-101.477 -119.544,-101.477 ; -260.544,-67.477 -119.544,-67.477 ; -259.544,-85.477 -119.544,-85.477 ; -228.544,-101.477 -228.544,-85.477 ; -132.544,-101.477 -132.544,-85.477 ; -119.544,-107.477 -119.544,-47.477
  lines w0.508: -40.566,393.727 -40.566,406.681 ; -40.566,393.727 -40.566,406.681 ; -40.566,393.727 -40.566,406.681 ; -280.088,17.172 -260.784,17.172 -280.088,17.172 ; -280.088,17.629 -260.784,17.629 -280.088,17.629 ; -280.088,142.597 -260.784,142.597 -280.088,142.597 ; -280.088,143.054 -260.784,143.054 -280.088,143.054 ; -280.088,268.022 -260.784,268.022 -280.088,268.022 ; -280.088,268.479 -260.784,268.479 -280.088,268.479 ; -150.802,-120.928 -150.802,-107.974 -150.802,-120.928 ; -150.777,393.727 -150.777,406.681 -150.777,393.727 ; -150.345,-120.928 -150.345,-107.974 -150.345,-120.928 ; -150.32,393.981 -150.32,406.681 -150.32,393.981 ; -40.109,393.727 -40.109,406.681 -40.109,393.727 ; 69.644,393.727 69.644,406.681 69.644,393.727 ; 70.101,393.727 70.101,406.681 70.101,393.727 ; 179.906,-120.928 179.906,-107.974 179.906,-120.928 ; 179.906,393.727 179.906,406.681 179.906,393.727 ; 180.363,-120.928 180.363,-107.974 180.363,-120.928 ; 180.363,393.727 180.363,406.681 180.363,393.727 ; 290.142,-120.928 290.142,-107.974 290.142,-120.928 ; 290.142,393.727 290.142,406.681 290.142,393.727 ; 290.599,-120.928 290.599,-107.974 290.599,-120.928 ; 290.599,393.727 290.599,406.681 290.599,393.727 ; 400.352,-120.928 400.352,-107.974 400.352,-120.928 ; 400.352,393.727 400.352,406.681 400.352,393.727 ; 400.809,-120.928 400.809,-107.974 400.809,-120.928 ; 400.809,393.727 400.809,406.681 400.809,393.727 ; 510.741,17.172 530.045,17.172 510.741,17.172 ; 510.741,17.629 530.045,17.629 510.741,17.629 ; 510.741,142.571 530.045,142.571 510.741,142.571 ; 510.741,143.029 530.045,143.029 510.741,143.029 ; 510.741,267.971 530.045,267.971 510.741,267.971 ; 510.741,268.428 530.045,268.428 510.741,268.428
  lines w1: -260.544,-107.477 510.456,-107.477 510.456,393.523 -260.544,393.523 -260.544,-107.477
  lines w1.1: -39.544,-120.477 -39.544,-107.477 ; 69.456,-120.477 69.456,-107.477
  text "1" at -203.38,397.511 h7.62
  text "6" at 347.952,397.333 h7.62
  text "5" at 237.36,397.257 h7.62
  text "7" at 457.883,397.206 h7.62
  text "2" at -93.043,397.105 h7.62
  text "3" at 16.99,397.105 h7.62
  text "4" at 127.759,397.105 h7.62
  text "D" at -265.229,327.839 h7.62
  text "D" at 519.453,327.687 h7.62
  text "C" at -265.229,202.388 h7.62
  text "C" at 519.58,202.185 h7.62
  text "B" at -265.356,76.785 h7.62
  text "B" at 519.351,76.785 h7.62
  text "ASSEMBLY BOTTOM" at 63.6,-41.5 h7.62
  text "A" at -265.102,-48.97 h7.62
  text "A" at 519.605,-49.097 h7.62
  text "1511 Sixth Ave. Suite 300, Seattle, WA 98101 206.381.0898" at -131.632,-65.477 h2.54
  text "PRINTED CIRCUIT BOARD ASSEMBLY" at -144.324,-73.977 h3.81
  text ".Board_Name" at -154.675,-82.45 h5.08
  text "REV" at -242.408,-88.477 h1.78
  text "DWG NO" at -134.544,-88.477 h1.78
  text "SIZE" at -123.696,-88.477 h1.78
  text ".PCB_Revision" at -238.448,-98.477 h7.62
  text "D" at -123.496,-98.477 h7.62
  text "600-" at -149.9,-98.575 h7.62
  text ".Board_Number" at -179.91,-98.627 h7.62
  text "SHEET 2 OF 2" at -236,-105.477 h1.78
  text "SCALE:NONE" at -124.424,-105.477 h1.78
  text "1" at -203.584,-117.525 h7.62
  text "5" at 237.437,-117.677 h7.62
  text "6" at 347.876,-117.677 h7.62
  text "4" at 127.988,-117.956 h7.62
  text "2" at -93.271,-117.982 h7.62
  text "3" at 17.168,-117.982 h7.62
  text "7" at 457.985,-118.541 h7.62
TITLEBLOCK:
  lines w0.25: -11.574,-45.773 109.426,-45.773 ; 46.926,-26.773 109.426,-26.773 109.426,-55.273 -11.574,-55.273 -11.574,-33.273 109.426,-33.273 ; 64.926,-55.273 64.926,-26.773 ; 64.926,-38.273 109.426,-38.273 ; 98.426,-45.773 98.426,-38.273
  text "PRODUCT" at 51.17,-29.273 h1.52
  text "1511 SIXTH AVENUE, THIRD FLOOR" at 65.926,-29.273 h1.52
  text "DEVELOPMENT" at 49.238,-32.273 h1.52
  text "SEATTLE,WA 98101  206.381.0898" at 65.926,-32.273 h1.52
  text "DATE" at 65.926,-35.273 h1.02
  text "07/13/16" at 78.806,-36.773 h2.03
  text "PRINTED CIRCUIT BOARD" at 7.19,-37.773 h2.29
  text "PART NUMBER" at 65.926,-40.273 h1.02
  text "REV" at 102.702,-40.273 h1.02
  text ".Board_Name" at 6.272,-43.763 h3.81
  text "601-" at 71.766,-44.273 h2.54
  text ".Board_Number" at 82.434,-44.273 h2.54
  text ".PCB_Revision" at 101.894,-44.273 h2.54
  text "PROPRIETARY AND CONFIDENTIAL" at 70.152,-48.773 h1.52
  text "THE INFORMATION CONTAINED IN THIS DRAWING IS PROPRIETARY AND" at 68.936,-50.773 h0.76
  text "RESTRICTED. ANY REPRODUCTION IN PART OR WHOLE WITHOUT THE" at 69.848,-52.273 h0.76
  text "EXPRESS WRITTEN PERMISSION OF THE OWNER IS PROHIBITED" at 70.564,-53.773 h0.76
Assembly_Top:
  lines w0.15: -2.6,2.075 3.2,2.075 ; 0.025,-6.325 0.425,-6.325 ; 4.75,-0.775 4.725,-0.8 3.2,-0.8 3.2,-0.45 3.2,2.075 ; 13.075,-16.85 13.075,-16.5 17.425,-16.5 18.55,-16.5 18.55,-16.6 18.55,-16.9 18.55,-19.45 17.65,-19.45 13.075,-19.45 ; 13.075,-16.825 13.075,-19.45 ; 14.075,1.15 14.75,1.15 ; 15.8,-16.475 15.8,-15.225 ; 20.8,-16.5 20.8,-15.45 ; 20.95,-2.75 20.95,-0.775 20.95,2.7 25.425,2.7 ; 21.6,-4.3 17.4,-4.3 17.4,-3.825 16,-3.825 16,-4.325 14.25,-4.325 14.25,-2.775 21.6,-2.775 ; 21.625,-4.275 21.625,-2.775 ; 21.825,-4.225 22.875,-4.225 22.875,-5.475 ; 21.825,-2.75 22.8,-2.75 22.8,-1.6 24.6,-1.6 24.6,-5.475 22.9,-5.475 ; 24.25,-8.6 25.4,-8.6 ; 24.625,-3.2 25.4,-3.2 ; 3.2,2.075 3.2,2.075 ; 13.075,-19.45 13.075,-19.45 ; 28.25,-2.075 28.25,-0.825 31.15,-0.825 31.15,-5.325 28.425,-5.325 28.325,-5.325 28.325,-4.05 25.425,-4.05 25.425,-3.35 25.425,-2.075 28.25,-2.075 ; 28.25,-2.075 28.25,-2.075 ; -5.375,-2.825 -5.375,1.375 -4.075,1.375 -4.075,4.025 -5.275,4.025 -5.275,5.525 -2.575,5.525 -2.575,-2.825 -5.375,-2.825 ; 4.7,-5.6 6.3,-5.6 6.3,-0.65 4.75,-0.65 4.75,-1.6 5.2,-1.6 5.2,-2.55 4.7,-2.55 4.7,-5.6 ; 13.625,-15.225 17.975,-15.225 17.975,-13.175 13.625,-13.175 13.625,-15.225 ; 18.425,-15.45 18.425,-14.825 18.425,-12.9 19.6,-12.9 24.75,-12.9 24.75,-15.45 19.45,-15.45 18.425,-15.45 ; 19.2,-20.4 21.6,-20.4 29.675,-20.4 29.675,-16.5 21.6,-16.5 19.2,-16.5 19.2,-18.9 19.2,-20.4 ; 22.75,-12.875 22.75,-6.15 24.25,-6.15 24.25,-12.875 22.75,-12.875 ; 25.4,-14.65 28.6,-14.65 28.6,-5.65 25.4,-5.65 25.4,-14.65 ; 25.5,0.2 25.5,3.05 36,3.05 36,0 28.75,0 28.75,1.55 27.95,1.55 27.95,0.2 25.5,0.2
  text "DIMENSIONS ARE FOR REFERENCE ONLY." at -9.538,-48.459 h2.29
  text "USE BOARD OUTLINE FOR DIMENSIONAL DATA." at -14.488,-54.159 h2.29
Drill Drawing:
  lines w0.254: -110.791,43.067 -110.367,43.067 -109.944,42.644 -109.521,43.067 -109.097,43.067 -109.521,43.49 -109.097,43.913 -109.521,43.913 -109.944,44.337 -110.367,43.913 -110.791,43.913 -110.367,43.49 -110.791,43.067
  lines w0.381: -112.31,41.501 83.573,41.501 ; -112.31,45.311 83.573,45.311 ; -98.317,37.691 -98.317,49.121 ; -84.605,37.691 -84.605,49.121 ; -57.181,37.691 -57.181,49.121 ; -44.332,37.691 -44.332,49.121 ; -25.693,37.691 -25.693,49.121 ; 4.524,37.691 4.524,49.121 ; 19.506,37.691 19.506,49.121 ; 38.45,37.691 38.45,49.121 ; 54.955,37.691 54.955,49.121 ; -112.31,37.691 83.573,37.691 83.573,49.121 -112.31,49.121 -112.31,37.691
  text "Symbol" at -110.024,46.454 h1.83
  text "Count" at -97.174,46.454 h1.83
  text "Hole Size" at -83.462,46.454 h1.83
  text "Plated" at -56.038,46.454 h1.83
  text "Hole Type" at -43.189,46.454 h1.83
  text "Drill Layer Pair" at -24.55,46.454 h1.83
  text "Via/Pad" at 5.667,46.454 h1.83
  text "Pad Shape" at 20.649,46.454 h1.83
  text "Template" at 39.593,46.454 h1.83
  text "Hole Tolerance" at 56.098,46.454 h1.83
  text "80" at -97.174,42.644 h1.52
  text "0.279mm (11.00mil)" at -83.462,42.644 h1.52
  text "PTH" at -56.038,42.644 h1.52
  text "Round" at -43.189,42.644 h1.52
  text "Layer 4 - Layer 6" at -24.55,42.644 h1.52
  text "Via" at 5.667,42.644 h1.52
  text "Rounded" at 20.649,42.644 h1.52
  text "v38h28mx0" at 39.593,42.644 h1.52
  text "80 Total" at -97.174,38.834 h1.52
DXF_12022015_bot:
  drawing of 815 lines, arcs and shapes, not listed
DXF_12022015_top:
  circle w0.1: c23,0 r1.5
  circle w0.1: c23,0 r0.65
  circle w0.1: c0,0 r0.65
  circle w0.1: c0,0 r1.5
  lines w0.1: -4.04,0 -2.54,0 0,0 ; -2,-1.234 -1.976,-1.271 ; 0,-4.04 0,-2.54 0,0 ; 0,4.04 0,2.54 0,0 ; 4.04,0 2.54,0 0,0 ; 24.976,-1.271 25,-1.234 ; -2,-0.965 ccw(c0,-0.965) -0.518,-2.897 0.258,-3.105 cw(c-0.26,-5.037) 1.74,-5.037 1.74,-14.5 ccw(c2.74,-14.5) 2.74,-15.5 20.26,-15.5 ccw(c20.26,-14.5) 21.26,-14.5 21.26,-5.037 cw(c23.26,-5.037) 22.742,-3.105 23.518,-2.897 ccw(c23,-0.965) 25,-0.965 25,10.086 ccw(c24,10.086) 24.707,10.793 23.293,12.207 ccw(c22.586,11.5) 22.586,12.5 0,12.5 ccw(c0,10.5) -2,10.5 -2,-0.965

## Dimensions
24,-14.825 to 27.66,-17.377 on FAB_DWG
24,-15.825 to 0.025,12.525 on FAB_DWG
-2,10.5 to 25,10.1 on FAB_DWG

## Text inside footprints (layer, text, board x,y; h text height)
D1: Bottom Overlay "A" at 6.775,-5.15 h0.7 r270; Bottom Overlay "C" at 6.55,-4.125 h0.7 r270
J1: Bottom Overlay "1" at -0.1,8 h0.7; Bottom Overlay "2" at 0.1,11.3 h0.7; Bottom Overlay "99" at 23.492,7.931 h0.7; Assembly_Bottom "99" at 24.575,8.55 h0.6; Assembly_Bottom "100" at 24.95,10.95 h0.6; Assembly_Bottom "2" at -0.65,10.775 h0.6; Assembly_Bottom "1" at -0.8,8.225 h0.6
J2: Bottom Overlay "79" at 21.275,-15.2 h0.7; Bottom Overlay "80" at 21.5,-11.7 h0.7; Bottom Overlay "2" at 2.6,-11.7 h0.7; Bottom Overlay "1" at 2.348,-15.041 h0.7; Assembly_Bottom "1" at 1.7,-14.9 h0.6; Assembly_Bottom "2" at 1.825,-12.075 h0.6; Assembly_Bottom "80" at 22,-11.975 h0.6; Assembly_Bottom "79" at 22.05,-14.65 h0.6
J3: Mechanical 24 "1" at 4.294,0.908 h0.64; Mechanical 24 "2" at 5.813,-0.585 h0.64; Mechanical 24 "3" at 5.813,2.37 h0.64
Y3: Mechanical 24 "3" at 12.51,-13.969 h0.64 r270